# Altium PCB ECE453_Custom.PcbDoc
Units mil, origin at the board's own origin, x right, y up, seen from the top; angles counter-clockwise.
Board outline 2347.18 x 3917.24 mil, 2 copper layers (Top Layer, Bottom Layer); 9 components, 4 nets, 30 pads, 0 vias.
Unrouted connection lines stored in the file: 7.
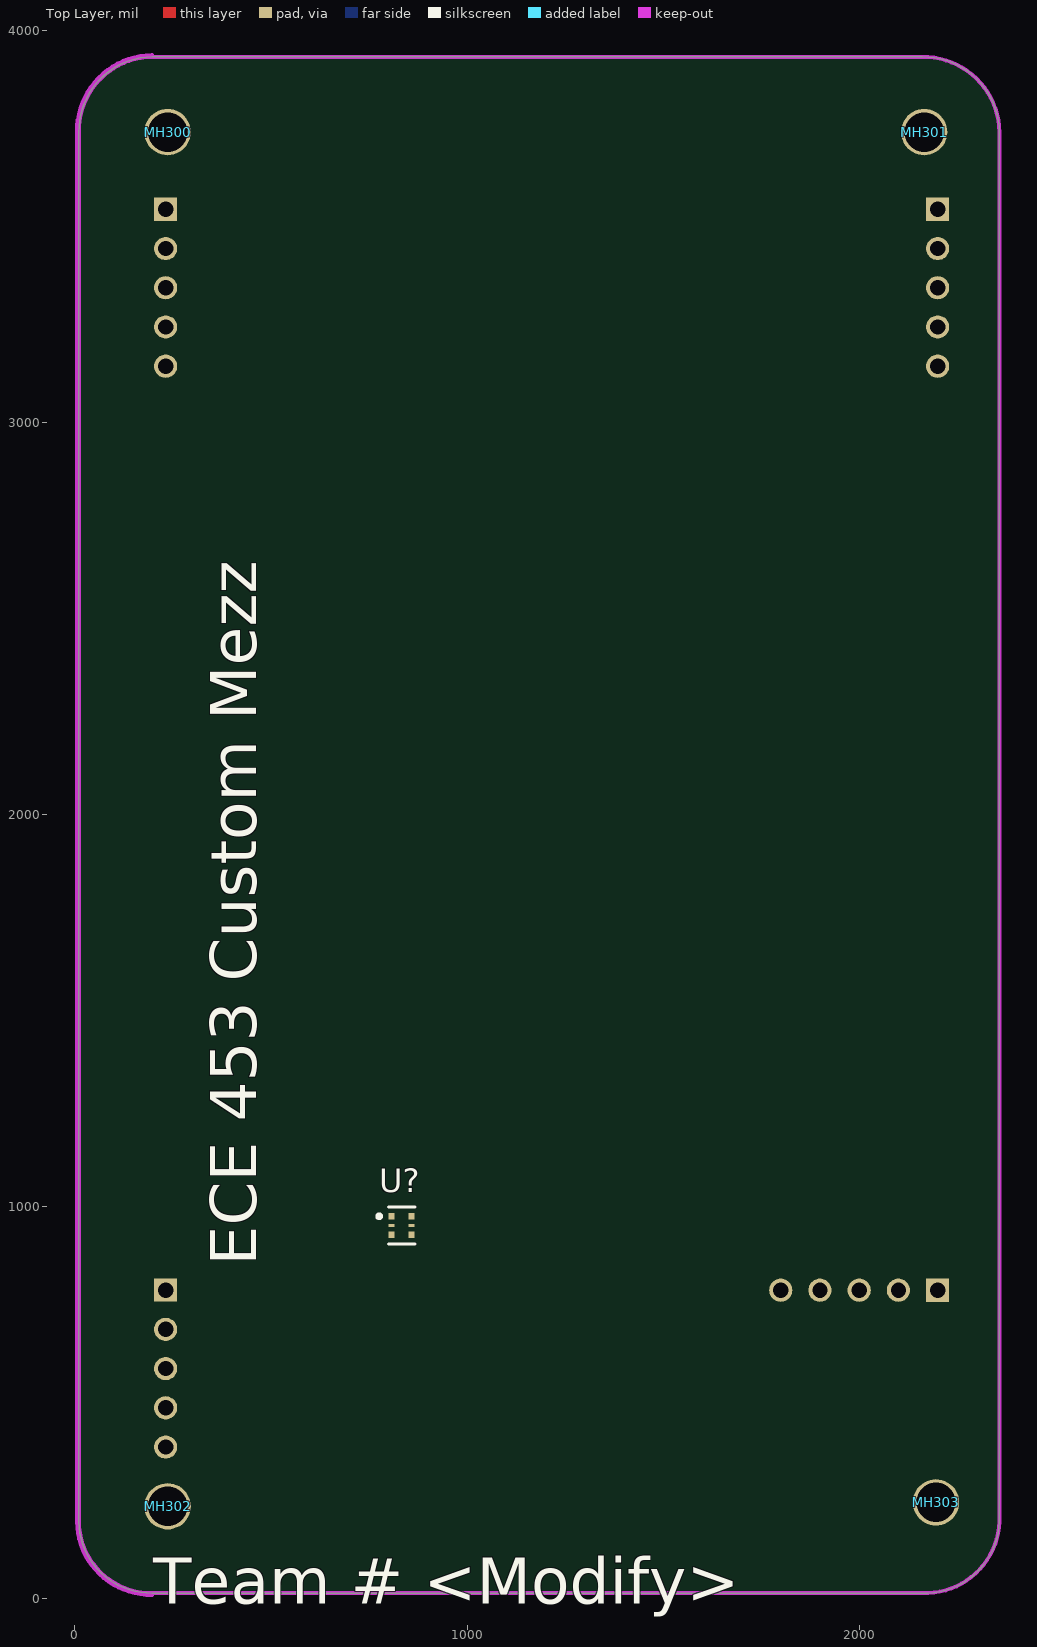
[diagram p0: Top Layer view]
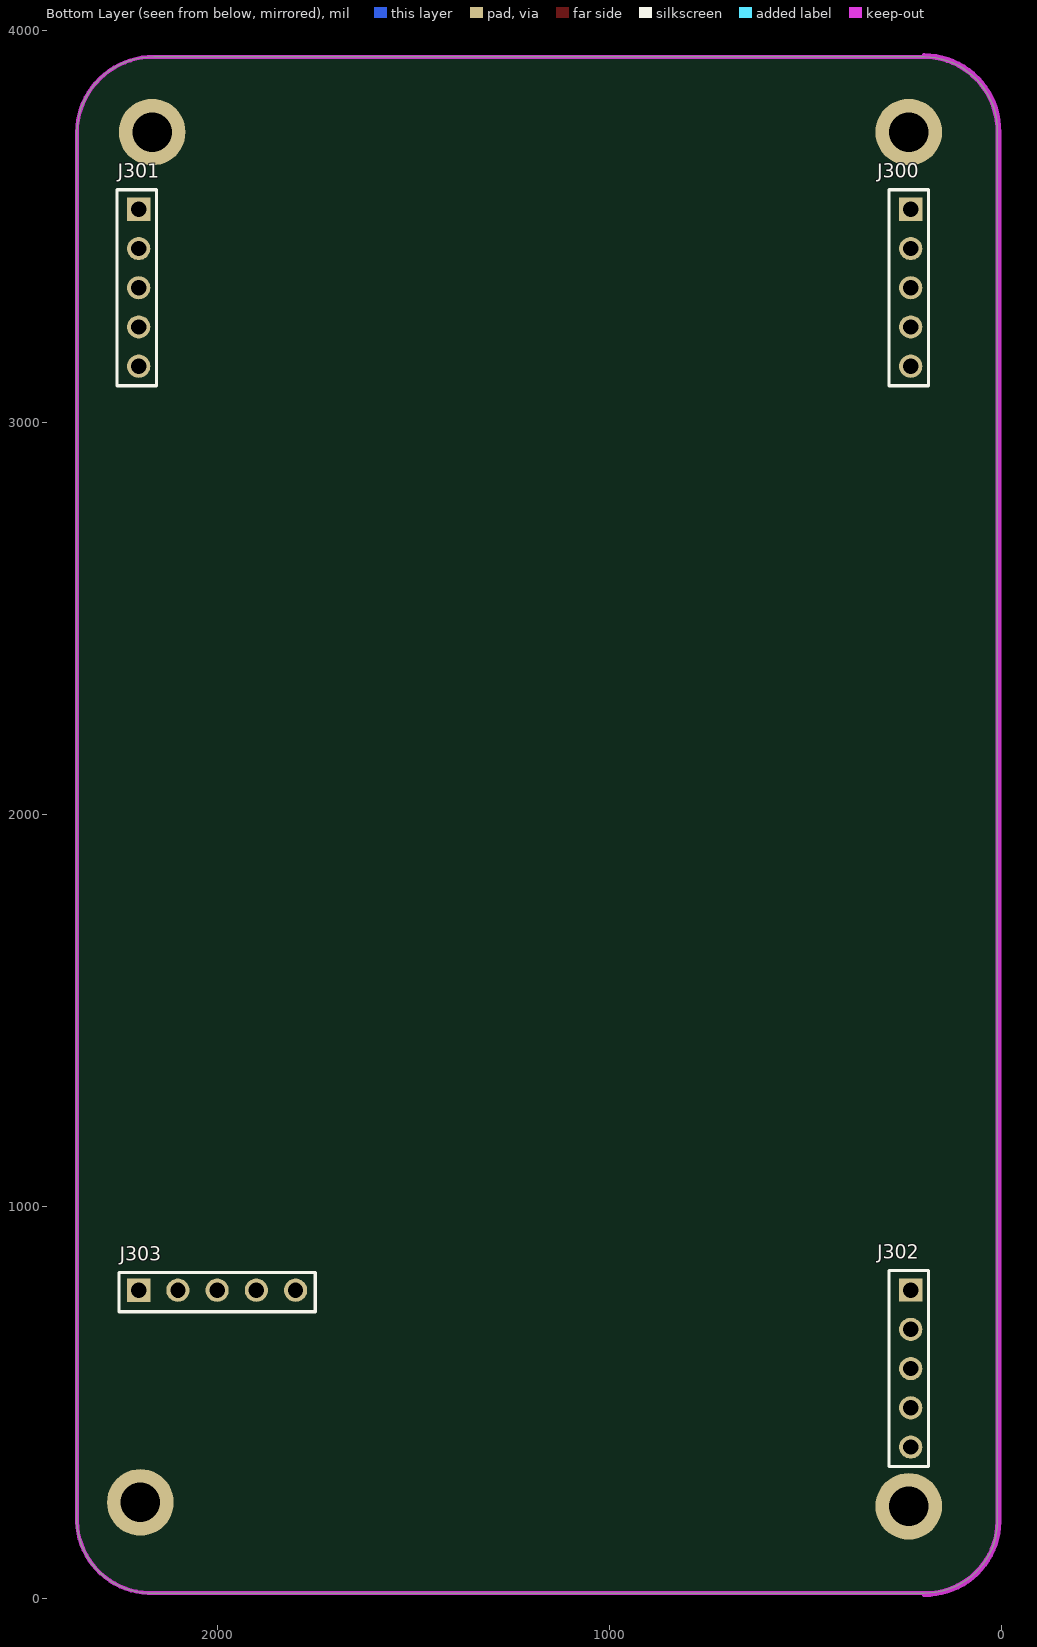
[diagram p1: Bottom Layer view, seen from below]

## Layer stack, top to bottom
Top Solder: solder mask 0.4, Solder Resist, Dk 3.5
Top Layer: signal copper 1.4
Dielectric1: dielectric 12.6, FR-4, Dk 4.8
Bottom Layer: signal copper 1.4
Bottom Solder: solder mask 0.4, Solder Resist, Dk 3.5

## Board outline
10.01,196.88 ccw(c194.35,199.35) 196.78,15.01 cw(c196.85,10) 196.85,15.02 2160.35,15.02 cw(c2160.35,10) 2160.58,15.01 ccw(c2167.85,204.35) 2357.19,196.95 2357.19,3740.13 ccw(c2162.85,3737.66) 2160.45,3931.99 ccw(c2162.85,3737.66) 2160.42,3931.99 2160.45,3931.99 cw(c2160.35,3937.01) 2160.35,3931.99 200,3931.99 cw(c200,3937.01) 198.43,3932.25 cw(c196.85,3937.01) 196.91,3931.99 ccw(c199.35,3742.66) 10.01,3740.25 ccw(c199.35,3742.66) 10.01,3740.22 10.01,3740.25 cw(c5,3740.16) 10.01,3740.16 10.01,196.88 cw(c194.35,199.35)

## Design rules (kind name [scope] priority, off if disabled: settings)
BoardOutlineClearance [All] p1: gap=50 ignorepadtopadclearanceinfootprint=FALSE
Clearance Polygon_Clearance [All vs InPolygon] p1: gap=12 ignorepadtopadclearanceinfootprint=TRUE
Clearance [All] p2: gap=7 ignorepadtopadclearanceinfootprint=TRUE
ComponentClearance [InComponent('U3')] p1: gap=0 collisioncheckmode=3 verticalgap=10 showdistances=FALSE
Height [All] p1: minheight=0 maxheight=866.14 prefheight=500
HoleSize [All] p1: absolutevalues=TRUE maxlimit=250 minlimit=15 maxpercent=80.000 minpercent=20.000
MinimumAnnularRing [All] p1: minimumring=7
MinimumSolderMaskSliver [All] p1: minsoldermaskwidth=1
NetAntennae NetAntennae_5.0V [InNet('5.0V')] p1: netantennaetolerance=0
NetAntennae NetAntennae_3.3V [InNet('3.3V')] p2: netantennaetolerance=0
PolygonConnect [IsNamedPolygon('5.0V_L01_P019') or IsNamedPolygon('3.3V_L01_P020') vs IsVia] p1: connectstyle=Relief reliefconductorwidth=10 reliefentries=4 polygonreliefangle="90 Angle" airgapwidth=10
PolygonConnect PolygonConnect_2 [All vs IsVia] p2: connectstyle=Relief reliefconductorwidth=15 reliefentries=4 polygonreliefangle="90 Angle" airgapwidth=10
PolygonConnect PolygonConnect_1 [All] p3: connectstyle=Relief reliefconductorwidth=10 reliefentries=4 polygonreliefangle="90 Angle" airgapwidth=10
RoomDefinition Sheet1 [InComponentClass('Sheet1')] p1: confinementstyle=ConfineIn formatcopy=TRUE lockcomponents=FALSE outline 1750,400 1950,400 1950,700 1750,700
RoutingVias [All] p1: holewidth=15 width=30 viastyle="Through Hole" minholewidth=15 minwidth=30 maxholewidth=28 maxwidth=50
SilkToSilkClearance [All] p1: silktosilkclearance=1
SilkToSolderMaskClearance [IsPad] p1: minsilkscreentomaskgap=1 clearancetoexposedcopper=TRUE
SolderMaskExpansion [All] p1: expansion=4 istentingtop=FALSE
UnRoutedNet [All] p1: checkbadconnections=TRUE
Width [All] p1: maxlimit=472.44 minlimit=7 preferedwidth=15 minimp=50.000000 maximp=50.000000 favimp=50.000000
22 further rules are at their usual default settings.

## Classes and differential pairs
component class Sheet1: U?

## Components (designator, comment, footprint, x,y, rotation, side; value= is the part's Value field where it differs from the comment)
J300 "CONN_HEADER_MALE_1x5" HDR1X5 236.22,3543.31 r270 bottom
J301 "CONN_HEADER_MALE_1x5" HDR1X5 2204.72,3543.31 r270 bottom
J302 "CONN_HEADER_MALE_1x5" HDR1X5 236.22,787.4 r270 bottom
J303 "CONN_HEADER_MALE_1x5" HDR1X5 2199.61,782.28 r180 bottom
MH300 "MHOLE_2_55MM" MHOLE_2_55MM#1 236.22,3740.16 r90 top locked
MH301 "MHOLE_2_55MM" MHOLE_2_55MM#1 2165.35,3740.16 r90 top locked
MH302 "MHOLE_2_55MM" MHOLE_2_55MM#1 236.22,236.22 r90 top locked
MH303 "MHOLE_2_55MM" MHOLE_2_55MM#2 2165.35,236.22 r0 top locked
U? "APDS-9005-020" FP-ChipLED-6-MFG 832.87,952.2 r0 top

## Footprints (in the part's own frame and the unit in brackets; to place one, negate y for a bottom-side part, rotate by r counter-clockwise, add the part's x,y. Pads: shape width x height; smd on the part's side, far side on the other; paste and mask are expansions set on the pad)
FP-ChipLED-6-MFG [mm]
  rect 0.4x0.4 smd paste+0 mask+0: 1(-0.65,0.6) 3(-0.65,-0.6) 4(0.65,-0.6) 6(0.65,0.6)
  rect 0.4x0.2 smd paste+0 mask+0: 2(-0.65,0) 5(0.65,0)
  silkscreen extent -1.57,-1.2 0.85,1.2
HDR1X5 [mil] "Connector; Header; 5 Position"
  rect 59.06x59.06 hole 39: 1(0,5)
  round 59.06 hole 39: 2(100,5) 3(200,5) 4(300,5) 5(400,5)
  silkscreen extent -50,-50 450,50, body extent -50,-50 450,50, height 330
MHOLE_2_55MM#1 [mm] "2.55MM Mounting Hole"
  round 3 / inner round 4.572 / far side round 4.318 hole 2.55: 1(0,0)
MHOLE_2_55MM#2 [mm]
  round 3 / inner round 4.572 / far side round 4.318 hole 2.55: 1(0.762,0.254)

## Part data
J300 J301 J302 J303: "Header, 5-Pin", Color=Black, Manufacturer 1=Sullins, Manufacturer Part Number 1=PREC005SACN-RC, Package Quantity=1, Supplier Part Number 1=S1032EC-05-ND, ComponentLink1Description=http://www.farnell.com/cad/1737268.pdf, ComponentLink1URL=http://www.farnell.com/cad/1737268.pdf, ComponentLink2Description=http://katalog.we-online.de/em/datasheet/6130xx11121.pdf, ComponentLink2URL=http://katalog.we-online.de/em/datasheet/6130xx11121.pdf, ComponentLink3Description=https://datasheet.ciiva.com/741/xrxczzzsxxn-rc-st-11635-b-741840.pdf?src-supplier=Digi-Key, ComponentLink3URL=https://datasheet.ciiva.com/741/xrxczzzsxxn-rc-st-11635-b-741840.pdf?src-supplier=Digi-Key, Connector Type="Male Pin", Contact Mating Length=0.23inch, Contact Plating=Tin, Mount="Through Hole", Number of Positions=5, Number of Rows=1, Packaging=Bulk, Pitch=0.1inch, Pricing 1="1=0.19000, 10=0.17400, 25=0.12960, 50=0.11120, 100=0.10740, 250=0.09264, 500=0.08892 (USD)", RoHS=Yes, Stock 1=0, Supplier 1=Digi-Key, Termination=Solder
MH300 MH301 MH302 MH303: "Mounting Holde", Manufacturer Part Number="UW MTHOLE"
U?: library part CMP-18409-000006-1, "SENSOR OPT 500NM AMB 6CHIPLED", Case/Package=SMD/SMT, Dark Current=300nA, Max Operating Temperature=85°C, Max Supply Voltage=5.5V, Min Operating Temperature=-40°C, Min Supply Voltage=1.8V, Output Current=40uA, Package Quantity=1, Fall Time=5ms, Height=0.8mm, Lead Free="Lead Free", Length=2.4mm, Max Supply Voltage (DC)=5.5V, Min Supply Voltage (DC)=1.8V, Mount="Surface Mount", Number of Pins=6, Output Type=Voltage, Packaging="Tape and Reel", REACH SVHC="No SVHC", Rise Time=5ms, Termination=SMD/SMT, Wavelength=500nm, Width=2mm

## Nets (pads, with @x,y where several pads share a name; then routed paths per layer and width w, separated by ;. In a path a pad name is that pad's centre, name@x,y a point inside that pad or via, vN(x,y) a via of type N, cw(c..) or ccw(c..) an arc to the next point about the centre after c; other vN are vias at no path point)
3.3V: J301.1 J301.2 J301.3
5.0V: J300.1 J300.2 J300.3
GND: J300.4 J300.5 J301.4 J301.5
XRES_N: J302.5
pads on no net: J302.1 J302.2 J302.3 J302.4 J303.1 J303.2 J303.3 J303.4 J303.5 MH300.1 MH301.1 MH302.1 MH303.1 U?.1 U?.2 U?.3 U?.4 U?.5 U?.6

## Keep-outs
Keep-Out Layer:
  lines w10: 10.01,196.92 ccw(c194.35,199.35) 10.01,196.88 ; 5,196.85 ccw(c194.35,199.35) 196.85,10 cw(c194.35,199.35) 5,196.85 ; 5,196.85 5,3740.16 ; 5,196.85 5,3740.16 ; 5,3740.16 cw(c199.35,3742.66) 196.85,3937.01 ; 5,3740.16 cw(c199.35,3742.66) 196.85,3937.01 ; 10.01,196.88 ccw(c194.35,199.35) 196.78,15.01 cw(c196.85,10) 196.85,15.02 2160.35,15.02 cw(c2160.35,10) 2160.58,15.01 ccw(c2167.85,204.35) 2357.19,196.95 2357.19,3740.13 ccw(c2162.85,3737.66) 2160.45,3931.99 ; 10.01,196.88 10.01,3740.16 ccw(c5,3740.16) 10.01,3740.25 ; 10.01,3740.25 ccw(c199.35,3742.66) 10.01,3740.22 10.01,3740.25 ; 10.01,3740.25 cw(c199.35,3742.66) 196.91,3931.99 ccw(c196.85,3937.01) 198.43,3932.25 ccw(c200,3937.01) 200,3931.99 2160.35,3931.99 ccw(c2160.35,3937.01) 2160.45,3931.99 ; 196.85,3937.01 196.85,3937.01 ; 196.85,3937.01 196.85,3937.01 ; 2160.45,3931.99 ccw(c2162.85,3737.66) 2160.42,3931.99 ; 2160.42,3931.99 2160.45,3931.99

## Silkscreen, mask and mechanical layers (free items; w line width, h text height)
Top Overlay:
  text "ECE 453 Custom Mezz" at 500,850 h200 r90
  text "Team # <Modify>" at 200,-50 h200
Mechanical 2:
  lines w10: 196.85,3937.01 ccw(c199.35,3742.66) 5,3740.16 5,196.85 ccw(c194.35,199.35) 196.85,10 ; 200,3937.01 2160.35,3937.01 cw(c2162.85,3737.66) 2362.2,3740.16 2362.2,196.85 cw(c2167.85,204.35) 2160.35,10 196.85,10 ; 196.85,10 196.85,10

## Dimensions
1799.61,787.28 to 231.22,787.4 on Mechanical 5
2199.72,3543.31 to 2199.61,787.28 on Mechanical 5
231.22,3543.31 to 231.22,787.4 on Mechanical 5
231.22,3543.31 to 2199.72,3543.31 on Mechanical 5